# EAGLE board untitled (EAGLE 9.3.0)
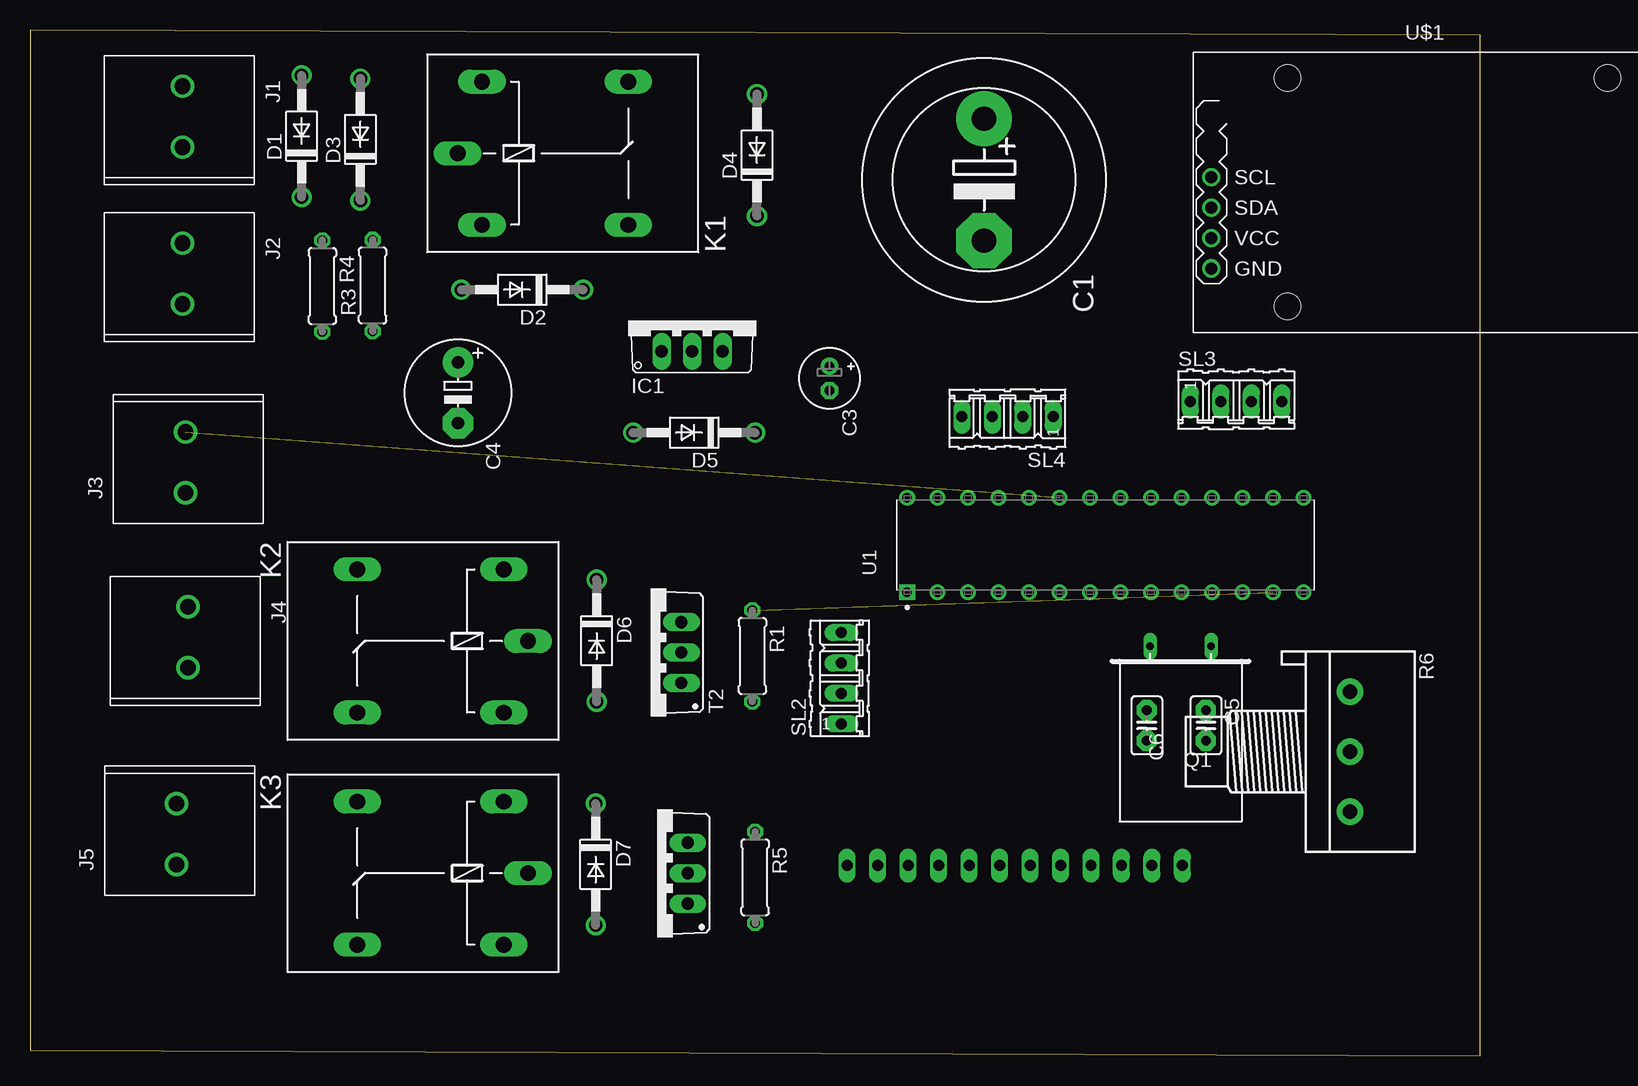
[diagram p0: board, top side]
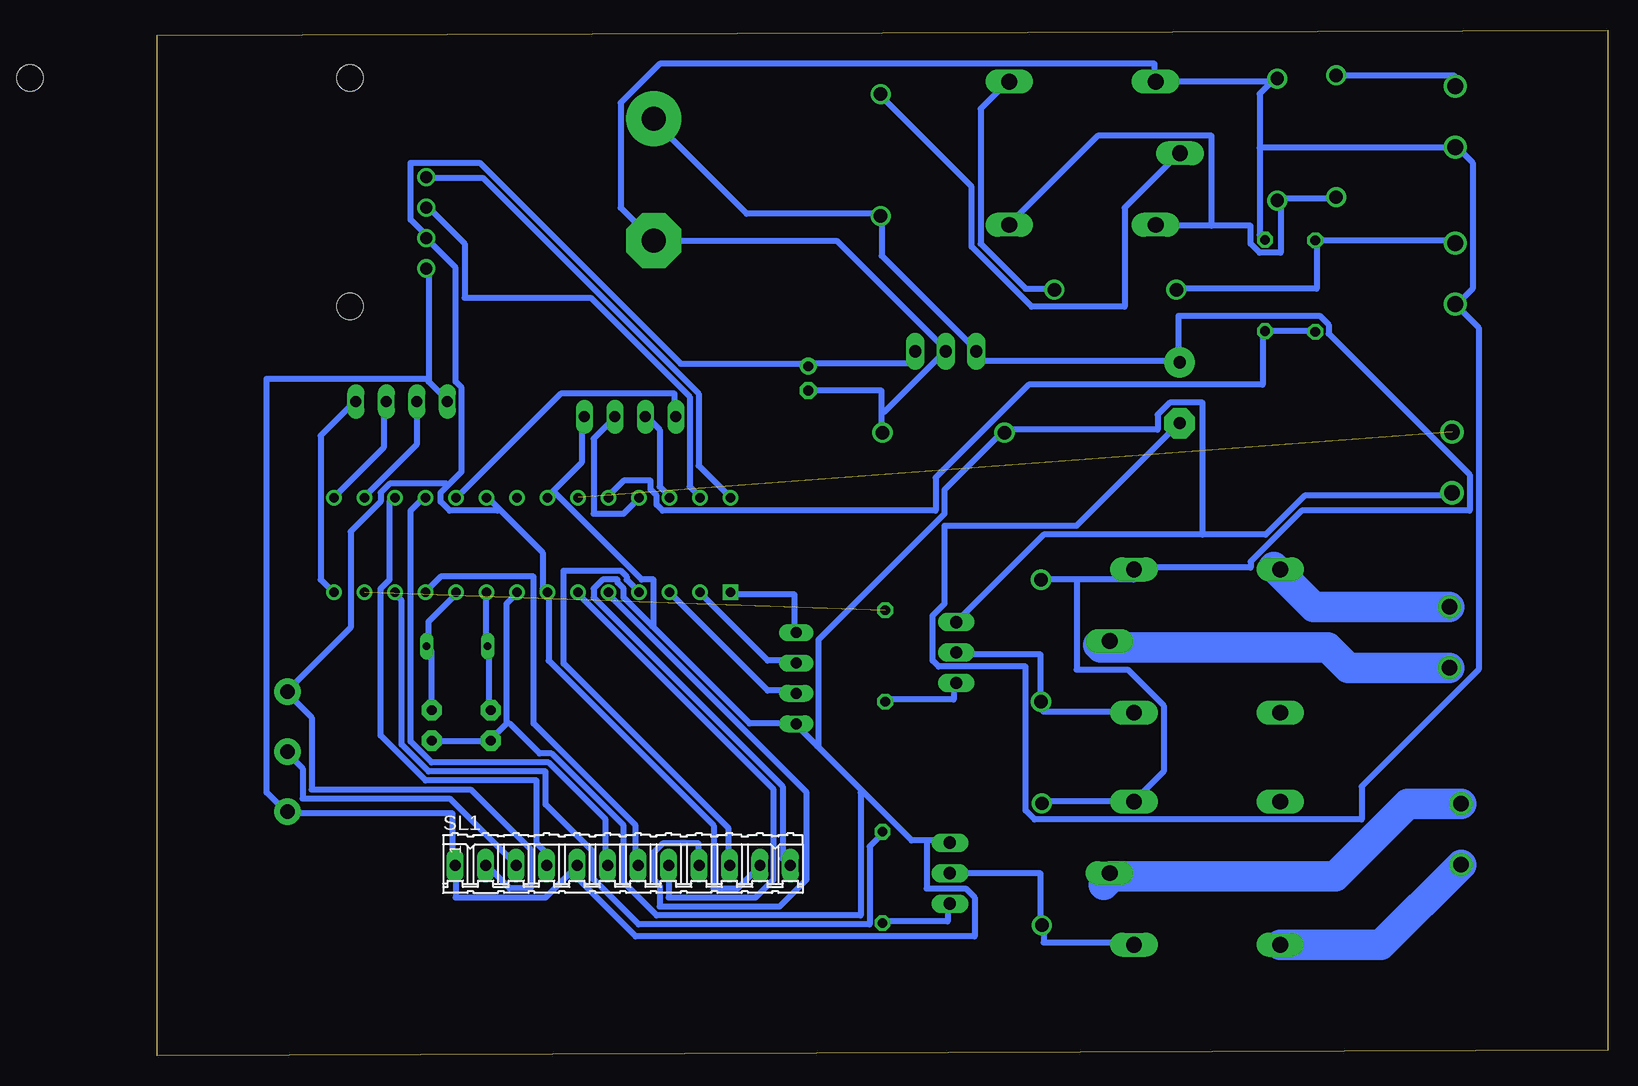
[diagram p1: board, bottom side, seen from below]

Size 120.85 x 85.51 mm. Coordinates in mm from the lower left corner, seen from the top.
Outline: 0,0.43 120.85,0 120.85,85.08 0,85.51 0,0.43
Copper layers (1*16): Top 0.035mm / dielectric 1.5mm / Bottom 0.035mm
Design rules "default *": minimum track width 20mil, minimum drill 0.35mm, track to track 6mil, track to pad 6mil, pad to pad 6mil, via to via 6mil, smd to smd 6mil, copper to edge 20mil, drill to drill 15mil, minimum pad ring 10mil, minimum via ring 8mil, stop-mask expansion 4mil, vias tented up to drill 0mil, thermal gap 10mil

## Footprints (pad centres in the part's own frame; a part is rotated, then mirrored left to right if it is on the bottom)
EB20D = drill 2.007 pad 4.597: + -5.08,0 | drill 2.007 pad 4.597 octagon: - 5.08,0
E2-5 = drill 0.813 pad 1.422: + -1.016,0 | drill 0.813 pad 1.422 octagon: - 1.016,0
E5-8,5 = drill 1.016 pad 2.54: + -2.54,0 | drill 1.016 pad 2.54 octagon: - 2.54,0
C025-025X050 = drill 0.813 pad 1.676 octagon: 1 -1.27,0; 2 1.27,0
DO41-10 = drill 1.118: A 5.08,0; C -5.08,0
TO220V = drill 1.016 long: 1 -2.54,-2.54; 2 0,-2.54; 3 2.54,-2.54
691201520002 = drill 1.3: 1 -2.54,0; 2 2.54,0
G5LE = drill 1.321 long: 1 -7.493,-5.969; 2 -7.493,5.969; O 4.699,5.969; P -9.525,0; S 4.699,-5.969
Q = drill 0.61 long: 1 -2.54,-7.62; 2 2.54,-7.62
0207/7 = drill 0.813 octagon: 1 -3.81,0; 2 3.81,0
3RP/1610N = drill 1.2 pad 2.184: 1 -5,0; 2 0,0; 3 5,0
12P = drill 0.914 long: 1 -13.97,0; 2 -11.43,0; 3 -8.89,0; 4 -6.35,0; 5 -3.81,0; 6 -1.27,0; 7 1.27,0; 8 3.81,0; 9 6.35,0; 10 8.89,0; 11 11.43,0; 12 13.97,0
04P = drill 0.914 long: 1 -3.81,0; 2 -1.27,0; 3 1.27,0; 4 3.81,0
TO220BV = drill 1.016 long: 1 -2.54,-2.54; 2 0,-2.54; 3 2.54,-2.54
DIP-28 = drill 0.79 pad 1.19 square: 1 -16.51,-3.95 | drill 0.79 pad 1.19: 2 -13.97,-3.95; 3 -11.43,-3.95; 4 -8.89,-3.95; 5 -6.35,-3.95; 6 -3.81,-3.95; 7 -1.27,-3.95; 8 1.27,-3.95; 9 3.81,-3.95; 10 6.35,-3.95; 11 8.89,-3.95; 12 11.43,-3.95; 13 13.97,-3.95; 14 16.51,-3.95; 15 16.51,3.95; 16 13.97,3.95; 17 11.43,3.95; 18 8.89,3.95; 19 6.35,3.95; 20 3.81,3.95; 21 1.27,3.95; 22 -1.27,3.95; 23 -3.81,3.95; 24 -6.35,3.95; 25 -8.89,3.95; 26 -11.43,3.95; 27 -13.97,3.95; 28 -16.51,3.95
RTC-DS3231-AT24C32 = drill 1: J1.3 -17.78,1.27; J1.4 -17.78,-1.27; J1.5 -17.78,-3.81; J1.6 -17.78,-6.35 | hole 2.2: -11.43,-9.525; -11.43,9.525; 15.24,9.525

## Placement (x,y rotation side)
C1  [EB20D]  79.5,73.02 270 top
C3  [E2-5]  66.62,56.46 270 top
C4  [E5-8,5]  35.66,55.27 270 top
C5  [C025-025X050]  97.99,27.53 270 top
C6  [C025-025X050]  93.07,27.53 270 top
D1  1N4004  [DO41-10]  22.63,76.66 90 top
D2  1N4004  [DO41-10]  41.02,63.86 180 top
D3  1N4004  [DO41-10]  27.53,76.38 90 top
D4  1N4004  [DO41-10]  60.58,75.08 90 top
D5  1N4004  [DO41-10]  55.35,51.94 180 top
D6  1N4004  [DO41-10]  47.22,34.59 270 top
D7  1N4004  [DO41-10]  47.14,15.95 270 top
IC1  788TV  [TO220V]  55.17,61.26 0 top
J1  [691201520002]  12.7,78.28 270 top
J2  [691201520002]  12.7,65.2 270 top
J3  [691201520002]  12.95,49.45 90 top
J4  [691201520002]  13.18,34.87 270 top
J5  [691201520002]  12.22,18.47 90 top
K1  G5L  [G5LE]  45.16,75.23 0 top
K2  G5L  [G5LE]  31.98,34.57 180 top
K3  G5L  [G5LE]  31.98,15.21 180 top
Q1  [Q]  95.89,26.52 180 top
R1  [0207/7]  60.2,33.32 270 top
R3  [0207/7]  28.55,64.21 90 top
R4  [0207/7]  24.36,64.16 270 top
R5  [0207/7]  60.43,14.86 270 top
R6  [3RP/1610N]  110.01,25.35 270 top
SL1  [12P]  82.07,15.85 0 bottom
SL2  [04P]  67.61,31.47 90 top
SL3  [04P]  100.51,54.53 0 top
SL4  [04P]  81.46,53.26 180 top
T1  2SC1306  [TO220BV]  52.27,15.21 90 top
T2  2SC1306  [TO220BV]  51.74,33.6 90 top
U1  ATMEGA328P-PU  [DIP-28]  89.61,42.57 0 top
U$1  RTC-DS3231-AT24C32  [RTC-DS3231-AT24C32]  116.23,71.98 0 top

## Library data of the parts
C1 C3-C6 R1 R3-R5 = adafruit
D1-D7 = diode
IC1 = linear
J1-J5 = Wurth_Elektronik_Electromechanic_Terminal_Blocks_Connectors_rev19b
K1-K3 = relay; OC_FARNELL: unknown; OC_NEWARK: unknown
Q1 = special
R6 = pot
SL1-SL4 = con-amp-quick; OC_FARNELL: unknown; OC_NEWARK: unknown
T1 T2 = transistor
U1 = Microcontroller; CREATED_BY: PCBLayout.com; DIGIKEY_PART_NUMBER: ATMEGA328P-PU-ND; MANUFACTURER: Microchip Technology; MPN: ATMEGA328P-PU; PACKAGE: DIP-28
U$1 = diy-modules

## Nets
N$1: D1.A J1.1
N$2: D2.A J2.1 R4.1
N$3: C1.- C3.- C4.- D3.A D5.C IC1.2 J1.2 J2.2 K1.2 R3.2
N$4: D2.C K1.O
N$5: D1.C D3.C K1.1 K1.S
N$6: D4.A K1.P
N$7: R5.1 U1.12
N$8: C3.+ IC1.3 R6.1 SL1.2 SL1.11 U1.7 U1.20 U$1.J1.5
N$9: C5.2 C6.2 D5.A J3.1 R6.3 SL1.1 SL1.5 SL1.12 SL2.1 SL3.1 SL4.1 T1.3 T2.3 U1.8 U1.22 U$1.J1.6
N$10: C6.1 Q1.2 U1.9
N$11: C5.1 Q1.1 U1.10
N$12: U1.28 U$1.J1.3
N$13: U1.27 U$1.J1.4
N$14: SL1.7 U1.11
N$15: R6.2 SL1.3
N$16: SL1.4 U1.17
N$17: SL1.6 U1.18
N$18: SL1.8 U1.6
N$19: SL1.9 U1.5
N$20: SL1.10 U1.4
N$21: J3.2 U1.23
N$22: J4.2 K2.P
N$23: J4.1 K2.S
N$24: R3.1 R4.2 U1.24
N$25: R1.1 U1.13
N$26: R1.2 T2.1
N$27: J5.2 K3.P
N$28: D6.A K2.2 T2.2
N$29: J5.1 K3.O
N$30: C1.+ C4.+ D4.C D6.C D7.C IC1.1 K2.1 K3.1
N$31: R5.2 T1.1
N$32: D7.A K3.2 T1.2
N$33: SL2.4 U1.1
N$34: SL2.3 U1.2
N$35: SL2.2 U1.3
N$36: SL3.4 U1.14
N$37: SL3.3 U1.15
N$38: SL3.2 U1.16
N$40: SL4.2 U1.25
N$41: SL4.3 U1.26
N$42: SL4.4 U1.19

## Tracks (layer width: path | path; a pad name or v marks a point on that pad's centre or on a via)
N$1
  Bottom 0.508: D1.A 22.5,81.68 12.75,81.68 12.75,80.93 J1.1
N$2
  Bottom 0.508: J2.1 12.75,67.93 24.25,67.93 R4.1 24.25,67.68 24.25,63.93 35.75,63.93 D2.A
N$3
  Bottom 0.508: 60.5,53.68 60.5,52.18 D5.C | 60.5,53.68 60.5,55.43 66.5,55.43 C3.- | 60.5,53.68 60.25,53.68 55.25,58.68 IC1.2 55.25,58.93 64.25,67.93 C1.- 79.75,68.18 82.25,70.68 82.25,79.43 79,82.68 37.75,82.68 37.75,81.43 K1.2 37.5,81.18 28.25,81.18 D3.A 27.75,81.43 29,80.18 29,75.68 | 29,75.68 29,68.43 28.75,68.18 R3.2 | C4.- 35.75,52.68 44.25,44.18 55.25,44.18 55.25,37.68 56.25,36.68 56.25,32.93 55.75,32.43 48.5,32.43 48.5,20.43 47.75,19.68 20.5,19.68 20.5,22.43 10.75,32.18 10.75,60.68 12.5,62.43 J2.2 12.5,62.68 11.25,63.93 11.25,74.43 12.5,75.68 J1.2 12.75,75.68 29,75.68
N$4
  Bottom 0.508: D2.C 46.25,63.93 48.5,63.93 52.25,67.68 52.25,78.93 50,81.18 K1.O
N$5
  Bottom 0.508: D1.C 22.75,71.43 27.5,71.43 D3.C 27.25,71.18 27.25,66.93 29,66.93 29.75,67.68 29.75,69.18 33,69.18 | 33,69.18 37.5,69.18 K1.1 | 33,69.18 33,76.68 42.5,76.68 49.75,69.43 K1.S
N$6
  Bottom 0.508: D4.A 60.5,79.93 53,72.43 53,67.43 48,62.43 40.25,62.43 40.25,70.68 35.75,75.18 K1.P
N$7
  Bottom 0.508: U1.12 101,38.43 100.5,37.93 100.5,25.93 98.25,23.68 88.5,23.68 88.5,20.93 84.5,16.93 84.5,14.68 80.75,10.93 61.5,10.93 61.5,17.43 60.5,18.43 R5.1
N$8
  Bottom 0.508: SL1.2 93.25,15.68 91.5,13.93 89.75,13.93 89.75,17.18 94.75,22.18 108,22.18 108,28.18 110,30.18 R6.1 110,30.43 104.75,35.68 104.75,43.68 102.25,46.18 102.25,46.93 101.5,47.68 96.75,47.68 96.62,47.56 | IC1.3 57.75,58.68 57.75,57.68 66.5,57.68 C3.+ 66.75,57.68 77.25,57.68 94,74.43 99.75,74.43 99.75,69.68 98.5,68.43 U$1.J1.5 98.25,67.93 96,65.68 96,56.18 95.5,55.68 95.5,48.68 96.62,47.56 | 92.38,45.56 93.25,46.43 U1.20 | 92.38,45.56 88.75,41.93 88.75,38.93 88.5,38.68 U1.7 88.25,38.43 88.25,32.93 74.5,19.18 74.5,13.93 72.5,13.93 70.75,15.68 SL1.11 | 96.62,47.56 97.25,46.93 97.25,46.18 96.5,45.43 92.5,45.43 92.38,45.56
N$9
  Bottom 0.508: 98.25,56.43 98.25,65.43 U$1.J1.6 | 98.25,56.43 98.25,56.18 96.75,54.68 SL3.1 | 98.25,56.43 111.75,56.43 111.75,21.93 110.25,20.43 R6.3 110,20.18 96.25,20.18 96.25,15.93 SL1.1 96,15.68 96,13.18 88.5,13.18 86,15.68 SL1.5 86.25,15.18 81,9.93 52.75,9.93 52.75,13.18 53.5,13.93 56.75,13.93 56.75,17.93 | 33.75,43.43 28.5,43.43 25.25,46.68 13,46.68 J3.1 | 33.75,43.43 47,43.43 54.25,36.18 T2.3 | 33.75,43.43 33.75,54.43 36.5,54.43 37.5,53.43 37.5,52.18 50.25,52.18 D5.A 50.5,51.93 55.25,47.18 55.25,45.18 65.75,34.68 65.75,25.93 65.88,25.81 | 91.75,27.68 91.75,37.68 91,38.43 U1.8 | 91.75,27.68 93,26.43 C6.2 93.25,26.18 97.75,26.18 C5.2 | 87.88,47.06 85.5,49.43 85.5,53.18 SL4.1 | 87.88,47.06 88.25,46.68 U1.22 | 62.12,22.06 58,17.93 56.75,17.93 | 62.12,22.06 65.88,25.81 | 65.88,25.81 67.5,27.43 SL2.1 67.75,27.68 71.5,27.68 79.62,35.81 | 56.75,17.93 55,17.93 T1.3 | 79.62,35.81 82,38.18 82,38.93 82.5,39.43 82.5,39.68 83.75,39.68 84.5,38.93 84.5,38.18 68.75,22.43 68.75,16.43 68.25,15.93 SL1.12 | 87.88,47.06 80.5,39.68 79.5,39.68 79.5,35.93 79.62,35.81 | 91.75,27.68 91.5,27.68 89,25.18 88,25.18 82,19.18 82,14.43 79.25,11.68 62.25,11.68 62.25,21.93 62.12,22.06
N$10
  Bottom 0.508: U1.9 93.5,38.43 93.5,34.18 Q1.2 93.25,33.93 93.25,28.93 C6.1
N$11
  Bottom 0.508: C5.1 98,28.93 98,33.68 98.25,33.93 Q1.1 98.25,34.18 98.25,36.18 96,38.43 U1.10
N$12
  Bottom 0.508: U1.28 73.25,46.68 75.75,49.18 75.75,55.18 93.75,73.18 98.25,73.18 U$1.J1.3
N$13
  Bottom 0.508: U1.27 75.75,46.68 76.5,47.43 76.5,54.93 84.75,63.18 95.25,63.18 95.25,67.68 98.25,70.68 U$1.J1.4
N$14
  Bottom 0.508: U1.11 98.5,38.68 97.25,39.93 89.5,39.93 89.5,27.68 81,19.18 81,15.93 SL1.7
N$15
  Bottom 0.508: SL1.3 91,15.93 96.5,21.43 108.75,21.43 108.75,23.93 110,25.18 R6.2
N$16
  Bottom 0.508: U1.17 101.25,46.43 101.5,46.18 101.5,39.68 102.25,38.93 102.25,26.68 98.5,22.93 89.25,22.93 89.25,17.68 88.5,16.93 88.5,15.93 SL1.4
N$17
  Bottom 0.508: U1.18 98.75,46.43 99.75,45.43 99.75,26.18 98,24.43 88.25,24.43 83.5,19.68 83.5,15.93 SL1.6
N$18
  Bottom 0.508: U1.6 85.75,38.43 69.5,22.18 69.5,14.68 71,13.18 78.25,13.18 78.25,15.68 SL1.8
N$19
  Bottom 0.508: U1.5 83.25,38.43 66.75,21.93 66.75,14.68 69,12.43 79,12.43 79,14.18 79.5,14.68 79.5,16.93 78.75,17.68 75.75,17.68 75.75,15.93 SL1.9
N$20
  Bottom 0.508: U1.4 80.75,38.68 81.75,39.68 81.75,39.93 82.25,40.43 87,40.43 87,32.68 73.25,18.93 73.25,15.93 SL1.10
N$21  (1 unrouted)
N$22
  Bottom 0.508: K2.P 41.5,34.68 41.5,34.02
  Bottom 2.54: J4.2 21.63,32.33 23.31,34.02 41.5,34.02 42.22,34.02 42.47,34.26
N$23
  Bottom 0.508: K2.S 27.5,40.68 27.64,40.54
  Bottom 2.54: J4.1 24.51,37.41 27.64,40.54 27.82,40.73
N$24
  Bottom 0.508: U1.24 83.25,46.68 82,47.93 79.75,47.93 79.75,47.18 79.25,46.68 79.25,45.93 78.75,45.43 56,45.43 56,48.18 48.25,55.93 28.75,55.93 28.75,60.18 R3.1 28.5,60.43 24.5,60.43 R4.2
N$25  (1 unrouted)
N$26
  Bottom 0.508: R1.2 60,29.68 54.5,29.68 54.5,30.93 T2.1
N$27
  Bottom 0.508: K3.P 41.5,15.43 41.49,14.96
  Bottom 2.54: J5.2 16.66,21.01 22.7,14.96 41.49,14.96 41.74,14.72 41.74,14.48 41.98,14.23
N$28
  Bottom 0.508: T2.2 54.25,33.43 47.25,33.43 47.25,29.68 D6.A 47,29.43 47,28.68 39.5,28.68 K2.2
N$29
  Bottom 2.54: J5.1 18.9,9.25 K3.O
N$30
  Bottom 0.508: D7.C 47,21.18 39.5,21.18 K3.1 39.25,21.43 37,23.68 37,29.18 40,32.18 44.25,32.18 44.25,39.68 | 44.25,39.68 39.5,39.68 39.5,40.43 K2.1 39.25,40.68 29.75,40.68 29.75,41.18 25.5,45.43 11.5,45.43 11.5,48.43 23.25,60.18 23.25,60.93 24,61.68 35.75,61.68 35.75,58.18 C4.+ 35.75,57.93 52.5,57.93 52.5,58.68 IC1.1 52.75,58.93 60.5,66.68 60.5,69.93 D4.C 60.75,70.18 71.75,70.18 79.5,77.93 C1.+ | 44.25,39.68 47,39.68 D6.C
N$31
  Bottom 0.508: R5.2 60.25,11.18 55,11.18 55,12.43 T1.1
N$32
  Bottom 0.508: T1.2 54.75,15.18 47.25,15.18 47.25,10.93 D7.A 47,10.68 47,9.43 39.5,9.43 K3.2
N$33
  Bottom 0.508: U1.1 73,38.43 67.75,38.43 67.75,35.43 SL2.4
N$34
  Bottom 0.508: U1.2 75.5,38.43 70,32.93 67.75,32.93 SL2.3
N$35
  Bottom 0.508: U1.3 78,38.43 70,30.43 67.75,30.43 SL2.2
N$36
  Bottom 0.508: U1.14 106.25,38.68 107.25,39.68 107.25,51.68 104.5,54.43 SL3.4
N$37
  Bottom 0.508: U1.15 106,46.68 102,50.68 102,54.43 SL3.3
N$38
  Bottom 0.508: U1.16 103.5,46.68 99.25,50.93 99.25,54.43 SL3.2
N$40
  Bottom 0.508: U1.25 80.75,46.43 82,45.18 84.5,45.18 84.5,51.43 82.75,53.18 SL4.2
N$41
  Bottom 0.508: U1.26 78.25,46.68 79,47.43 79,52.18 80,53.18 SL4.3
N$42
  Bottom 0.508: U1.19 95.75,46.68 87.25,55.18 77.75,55.18 77.75,53.43 SL4.4